# Altium PCB MFC.PcbDoc
Units mm, origin at the board's own origin, x right, y up, seen from the top; angles counter-clockwise.
Board outline 54.12 x 48.52 mm, 2 copper layers (Top Layer, Bottom Layer); 22 components, 29 nets, 104 pads, 46 vias.
Unrouted connection lines stored in the file: 1.
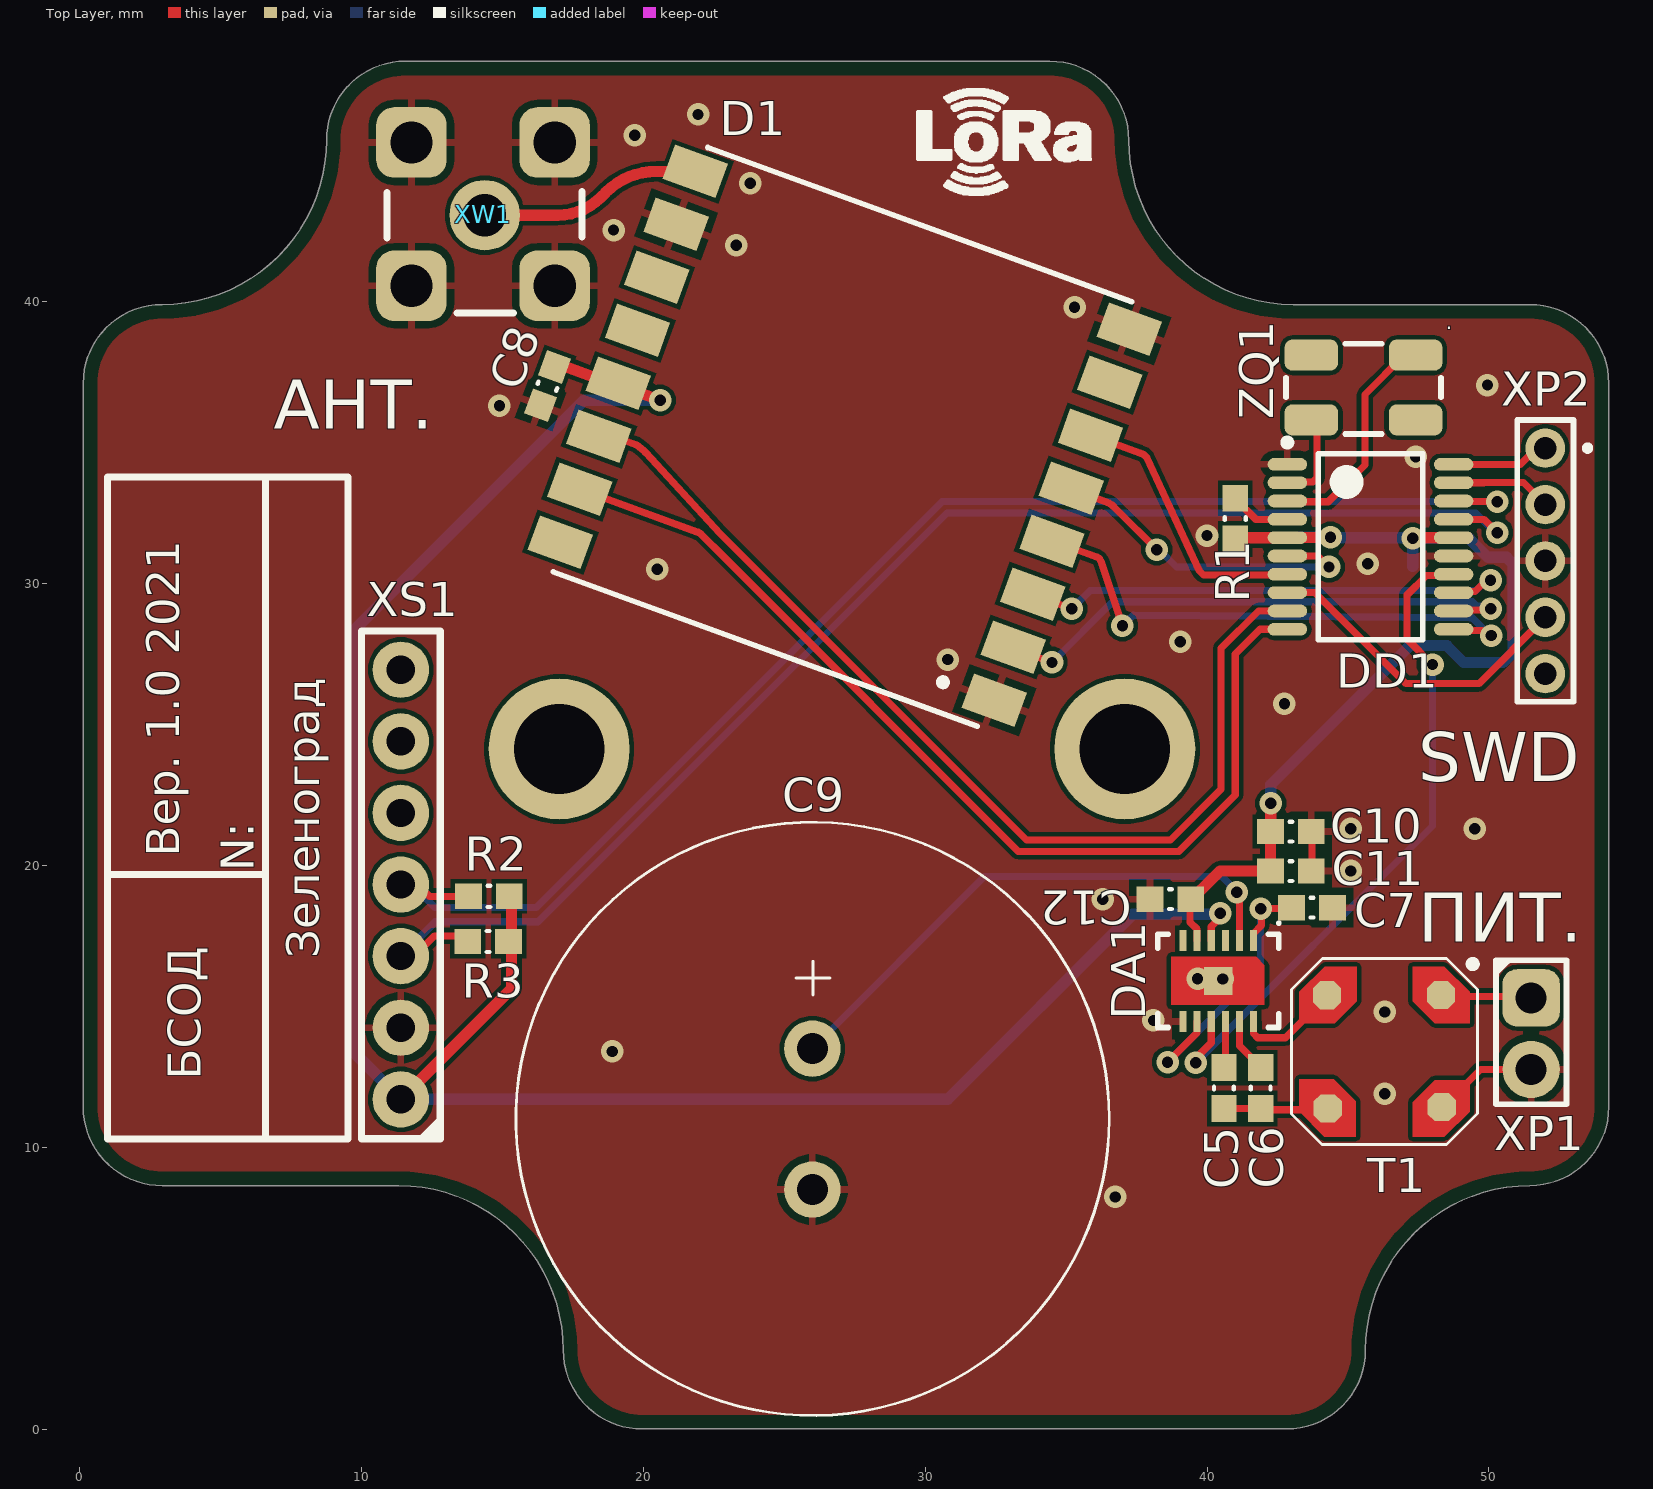
[diagram p0: Top Layer view]
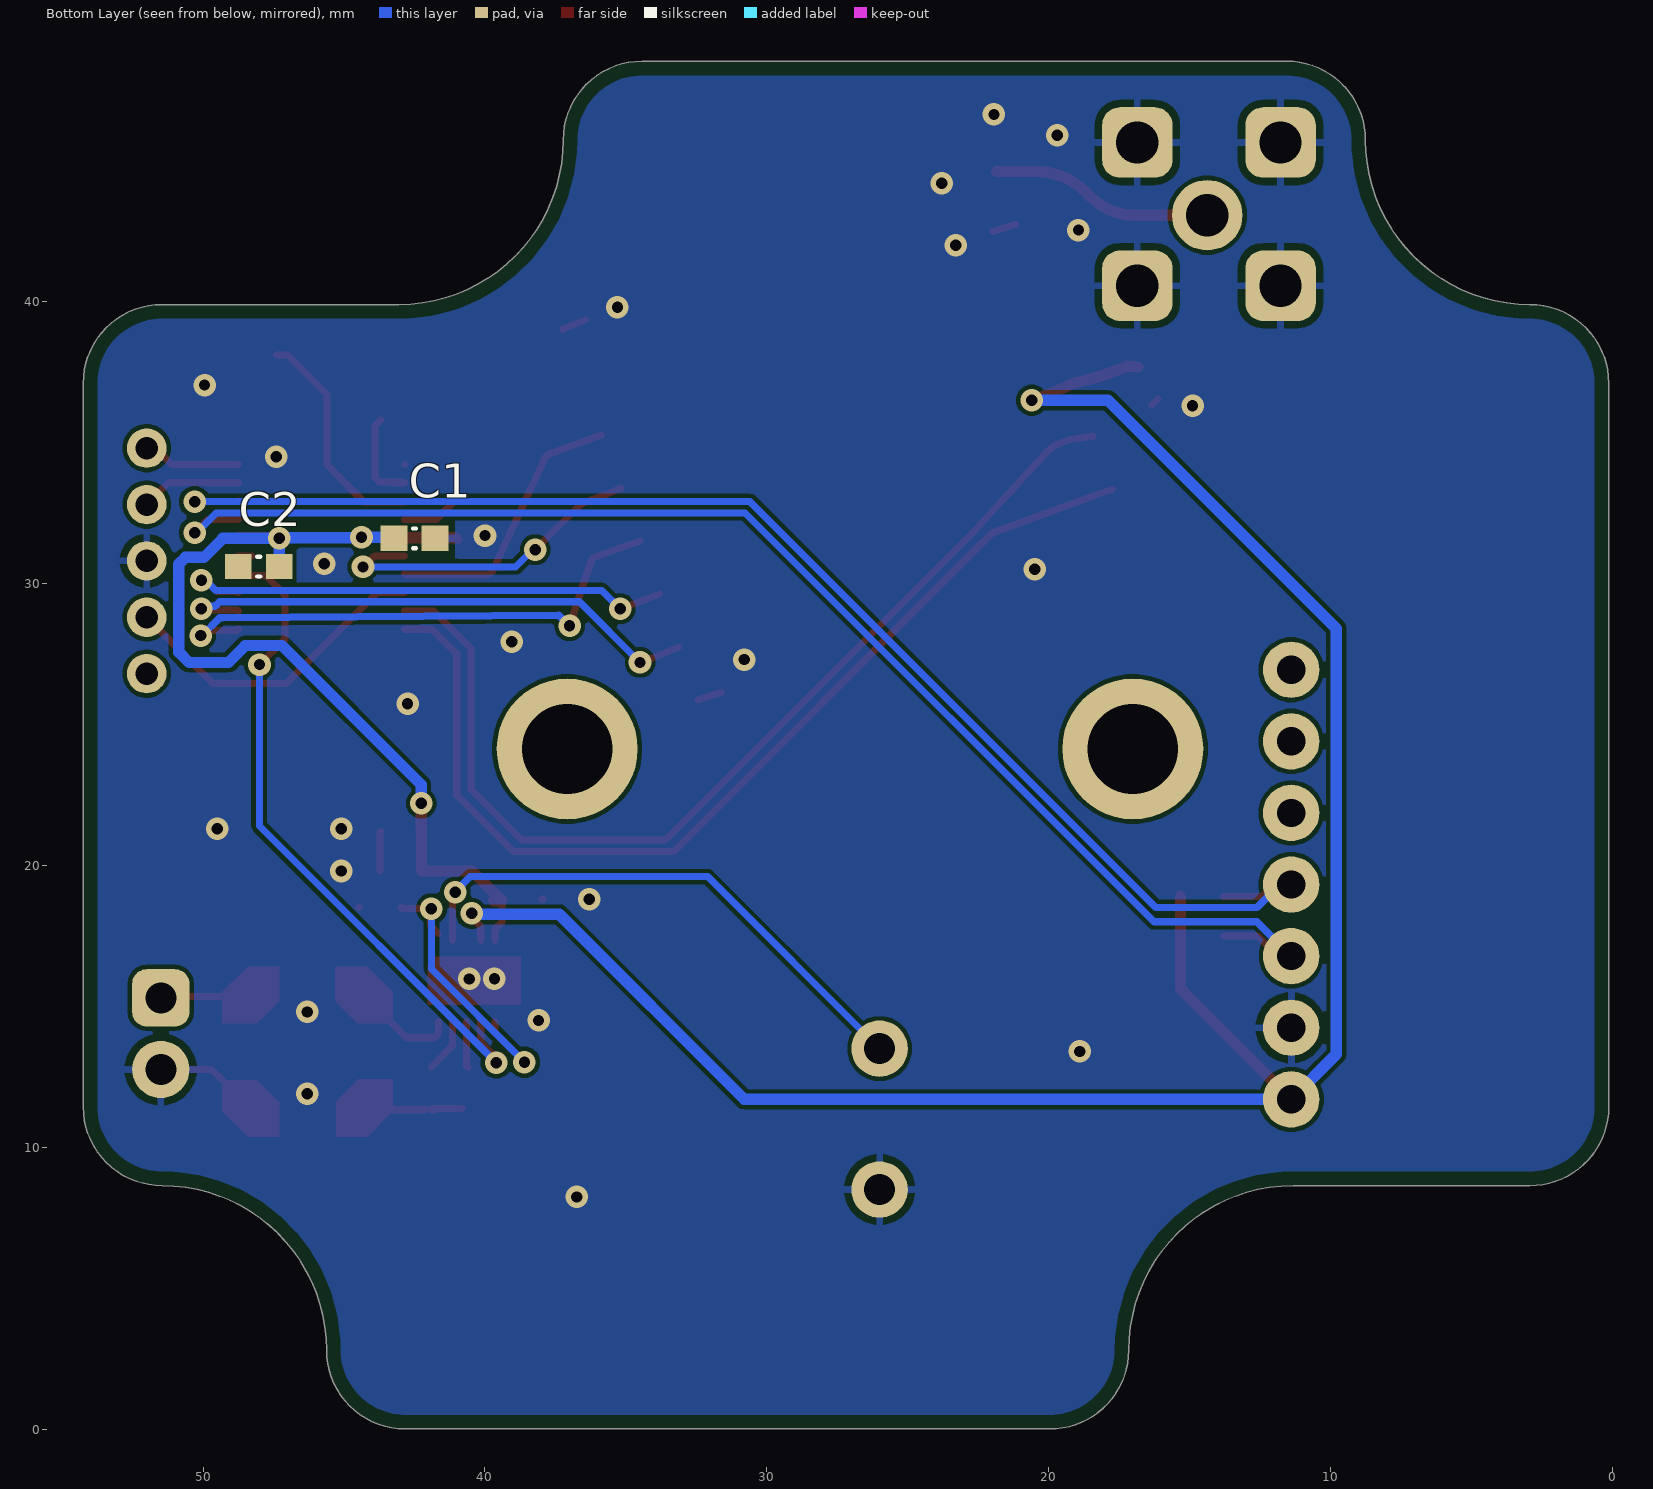
[diagram p1: Bottom Layer view, seen from below]

## Layer stack, top to bottom
Top Solder: solder mask 0.0102, Solder Resist, Dk 3.5
Top Layer: signal copper 0.0356
Dielectric 1: dielectric 0.32, FR-4, Dk 4.8
Bottom Layer: signal copper 0.0356
Bottom Solder: solder mask 0.0102, Solder Resist, Dk 3.5

## Board outline
2.933,8.637 11.33,8.637 cw(c11.33,2.806) 17.162,2.806 ccw(c19.962,2.806) 19.962,0.006 42.822,0.006 ccw(c42.822,2.806) 45.621,2.806 cw(c51.453,2.806) 51.453,8.637 ccw(c51.453,11.437) 54.253,11.437 54.253,37.097 ccw(c51.453,37.097) 51.453,39.896 43.055,39.896 cw(c43.055,45.728) 37.224,45.728 ccw(c34.424,45.728) 34.424,48.527 11.564,48.527 ccw(c11.564,45.728) 8.764,45.728 cw(c2.933,45.728) 2.933,39.896 ccw(c2.933,37.097) 0.133,37.097 0.133,11.437 ccw(c2.933,11.437)

## Design rules (kind name [scope] priority, off if disabled: settings)
BoardOutlineClearance [All] p1: gap=0.5 ignorepadtopadclearanceinfootprint=FALSE
Clearance [All] p1: gap=0.15 ignorepadtopadclearanceinfootprint=FALSE
PlaneConnect [All] p1: pad.planeconnectstyle=Relief pad.reliefexpansion=0.508 pad.reliefentries=4 pad.reliefconductorwidth=0.254 pad.reliefairgap=0.254 via.planeconnectstyle=Direct via.reliefexpansion=0.508 via.reliefentries=4 via.reliefconductorwidth=0.254 via.reliefairgap=0.254
PolygonConnect [All] p1: thpad.connectstyle=Relief thpad.reliefconductorwidth=0.254 thpad.reliefentries=4 thpad.polygonreliefangle="90 Angle" thpad.airgapwidth=0.254 smdpad.connectstyle=Relief smdpad.reliefconductorwidth=0.254 smdpad.reliefentries=4 smdpad.polygonreliefangle="90 Angle" smdpad.airgapwidth=0.254 via.connectstyle=Direct via.reliefconductorwidth=0.254 via.reliefentries=4 via.polygonreliefangle="90 Angle" via.airgapwidth=0.254
RoutingVias [All] p1: holewidth=0.4 width=0.8 viastyle="Through Hole" minholewidth=0.4 minwidth=0.6 maxholewidth=0.711 maxwidth=1.27
SolderMaskExpansion [All] p1: expansion=0.102 istentingtop=FALSE
Width [All] p1: maxlimit=1 minlimit=0.254 preferedwidth=0.254
29 further rules are at their usual default settings.

## Components (designator, comment, footprint, x,y, rotation, side; value= is the part's Value field where it differs from the comment)
C1 "0,1 мк" C_0603 42.5,31.6 r0 bottom value=0.1µF
C2 "0,1 мк" C_0603 48.025,30.6 r180 bottom value=0.1µF
C5 "1000" C_0603 40.6,12.1 r90 top value=1000pF
C6 "220" C_0603 41.9,12.1 r90 top value=220pF
C7 "2,2 мк" C_0603 43.725,18.5 r180 top value=2.2µF
C8 "0,1 мк" C_0603 16.6,37 r70 top value=0.1µF
C9 "1Ф 5,5В" EECF5R5u 26,11 r270 top locked
C10 "2,2 мк" C_0603 42.975,21.2 r180 top value=2.2µF
C11 "0,1 мк" C_0603 42.975,19.8 r180 top value=0.1µF
C12 "10 мк" C_0603 38.7,18.8 r0 top value=10µF
D1 "RFM98W" RFM98W 37.343,40.043 r160 top
DA1 "LTC3108EDE" DFN-12 40.4,15.9 r270 top
DD1 "STM32L010F4P6" TSSOP-20 45.8,31.3 r0 top
R1 "10 к" R_0603 41,32.3 r90 top
R2 "2,2 к" R_0603 14.525,18.9 r0 top
R3 "2,2 к" R_0603 14.5,17.3 r0 top
T1 "1 : 100" LPR6235 46.3,13.3 r270 top
XP1 "PLS-2" PLS-2 51.5,14.03 r0 top
XP2 "PLS2-5" PLS2-5 52,34.8 r270 top
XS1 "PBS-7" PBS-7 11.4,11.7 r90 top
XW1 "L-KLS1-SMA002-B" SMA-JR 14.4,43.1 r90 top
ZQ1 "8 МГц" "MJ CRYSTAL" 47.4,38.1 r180 top

## Footprints (in the part's own frame and the unit in brackets; to place one, negate y for a bottom-side part, rotate by r counter-clockwise, add the part's x,y. Pads: shape width x height; smd on the part's side, far side on the other; paste and mask are expansions set on the pad)
C_0603 [mm] "Chip Resistor, 2-Leads, Body 1.60x0.80mm, IPC Medium Density"
  rect 0.95x0.9 smd: 1(-0.725,0) 2(0.725,0)
  silkscreen extent -0.05,-0.35 0.05,0.35, body extent -0.8,-0.4 0.8,0.4, height 0.8
DFN-12 [mm] "SON, 12-Leads, Body 4.00x3.00mm, Pitch 0.50mm, Thermal Pad 3.30x1.70mm, IPC Medium Density"
  rect 0.75x0.25 smd: 1(-1.44,1.25) 2(-1.44,0.75) 3(-1.44,0.25) 4(-1.44,-0.25) 5(-1.44,-0.75) 6(-1.44,-1.25) 7(1.44,-1.25) 8(1.44,-0.75) 9(1.44,-0.25) 10(1.44,0.25) 11(1.44,0.75) 12(1.44,1.25)
  rect 1x1 smd: 13(0,0)
  Top Layer region: -0.855,-1.662 -0.855,1.338 -0.555,1.638 0.845,1.638 0.845,-1.662
  silkscreen extent -2.1,-2.15 1.65,2.2, body extent -1.5,-2 1.5,2, height 0.75
EECF5R5u [mm]
  round 2 hole 1.1: 1(-2.5,0) 2(2.5,0)
  silkscreen extent -10.53,-10.52 10.52,10.53, body extent -10.75,-10.75 10.76,10.75, height 8.01
LPR6235 [mm]
  oct 1x1 smd: 1(-2.1,2) 2(-2.091,-2.046) 3(1.921,-2.016) 4(1.875,2.025)
  Top Layer region: 2.921,2.121 2.046,3.021 0.921,3.021 0.921,1.771 1.696,0.996 2.921,0.996
  Top Layer region: 2.021,-3.021 2.921,-2.146 2.921,-1.021 1.671,-1.021 0.896,-1.796 0.896,-3.021
  Top Layer region: -3.1,-2.121 -2.225,-3.021 -1.1,-3.021 -1.1,-1.771 -1.875,-0.996 -3.1,-0.996
  Top Layer region: -3.1,2.121 -2.225,3.021 -1.1,3.021 -1.1,1.771 -1.875,0.996 -3.1,0.996
  silkscreen extent -3.4,-3.3 3.2,3.3, body extent -3.17,-3.01 2.91,3.07, height 3.35
"MJ CRYSTAL" [mm]
  rrect50% 1.9x1.1 smd: 1(0,0) 2(3.7,0) 3(3.7,2.3) 4(0,2.3)
  silkscreen extent -0.9,-0.4 4.6,2.8, body extent -0.67,-0.46 4.33,2.74, height 1
PBS-7 [mm]
  round 2 hole 1: 1(0,0) 2(2.54,0) 3(5.08,0) 4(7.62,0) 5(10.16,0) 6(12.7,0) 7(15.24,0)
  silkscreen extent -1.4,-1.4 16.61,1.4, body extent -1.27,-1.27 16.51,1.27, height 8.5
PLS2-5 [mm]
  round 1.4 hole 0.8: 1(0,0) 2(2,0) 3(4,0) 4(6,0) 5(8,0)
  silkscreen extent -1,-1 9,1.6, body extent -1,-1 9,1, height 6.1
PLS-2 [mil] "PLS-2 вилка штыревая 2.54мм 1x2 прямая"
  rrect50% 80x80 hole 43.31: 1(0,50)
  round 80 hole 43.31: 2(0,-50)
  silkscreen extent -49,-98 49,102, body extent -49,-100 49,100, height 335
R_0603 [mm] "Chip Resistor, 2-Leads, Body 1.60x0.80mm, IPC Medium Density"
  rect 0.95x0.9 smd: 1(-0.725,0) 2(0.725,0)
  silkscreen extent -0.05,-0.38 0.05,0.38, body extent -0.8,-0.45 0.75,0.4, height 0.45
RFM98W [mm]
  rect 2x1.3 smd: 1(-0.25,15) 2(-0.25,13) 3(-0.25,11) 4(-0.25,9) 5(-0.25,7) 6(-0.25,5) 7(-0.25,3) 8(-0.25,1) 9(16.125,1) 10(16.125,3) 11(16.125,5) 12(16.125,7) 13(16.125,9) 14(16.125,11) 15(16.125,13) 16(16.125,15)
  silkscreen extent 0,0.05 16,16.08, body extent 0,0 16,16, height 2.04
SMA-JR [mm]
  rrect50% 2.5x2.5 hole 1.5: 1(-2.536,-2.457) 1(-2.536,2.623) 1(2.544,-2.457) 1(2.544,2.623)
  round 2.5 hole 1.5: 2(-0.036,0.023)
  silkscreen extent -3.5,-3.43 0.8,3.49, body extent -3.6,-3.52 11.5,3.48, height 9.86
TSSOP-20 [mm] "TSOP, 20-Leads, Body 6,50x4,40mm, Pitch 0,65mm, IPC Medium Density"
  oval 1.4x0.45 smd: 1(-2.95,2.925) 2(-2.95,2.275) 3(-2.95,1.625) 4(-2.95,0.975) 5(-2.95,0.325) 6(-2.95,-0.325) 7(-2.95,-0.975) 8(-2.95,-1.625) 9(-2.95,-2.275) 10(-2.95,-2.925) 11(2.95,-2.925) 12(2.95,-2.275) 13(2.95,-1.625) 14(2.95,-0.975) 15(2.95,-0.325) 16(2.95,0.325) 17(2.95,0.975) 18(2.95,1.625) 19(2.95,2.275) 20(2.95,2.925)
  silkscreen extent -3.07,-3.3 1.85,3.82, body extent -3.3,-3.3 3.3,3.3, height 1.2

## Part data
C1 C2 C8 C11: library part GRM188R72A104MA35D, "CAP CER 0.1UF 100V X7R 0603", Manufacturer="Murata Electronics", Component Type=Capasitor, ComponentLink1Description=Datasheet, ComponentLink1URL=https://search.murata.co.jp/Ceramy/image/img/A01X/G101/ENG/GRM188R72A104MA35-01.pdf, Part Number=GRM188R72A104MA35D
C5: library part GRM1885C1H102FA01J, "CAP CER 1000PF 50V C0G/NP0 0603", Manufacturer="Murata Electronics", Component Type=Capasitor, ComponentLink1Description=Datasheet, ComponentLink1URL=https://www.murata.com/~/media/webrenewal/support/library/catalog/products/capacitor/mlcc/c02e.ashx?la=en-us, Part Number=GRM1885C1H102FA01J
C6: library part GRM1885C2A221FA01D, "CAP CER 220PF 100V C0G/NP0 0603", Manufacturer="Murata Electronics", Component Type=Capasitor, ComponentLink1Description=Datasheet, ComponentLink1URL=https://www.murata.com/~/media/webrenewal/support/library/catalog/products/capacitor/mlcc/c02e.ashx?la=en-us, Part Number=GRM1885C2A221FA01D
C7 C10: library part GRM188R61E225MA12D, "CAP CER 2.2UF 25V X5R 0603", Manufacturer="Murata Electronics", Component Type=Capasitor, ComponentLink1Description=Datasheet, ComponentLink1URL=https://search.murata.co.jp/Ceramy/image/img/A01X/G101/ENG/GRM188R61E225MA12-01.pdf, Part Number=GRM188R61E225MA12D
C9: library part EECF5R5U105, "1 Ф, 5.5 В, 5 мм, 2208H, Ионистор"
C12: library part GRM185R60J106ME15J, "CAP CER 10UF 6.3V X5R 0603", Manufacturer="Murata Electronics", Component Type=Capasitor, ComponentLink1Description=Datasheet, ComponentLink1URL=https://search.murata.co.jp/Ceramy/image/img/A01X/G101/ENG/GRM185R60J106ME15-01.pdf, Part Number=GRM185R60J106ME15J
D1: "LoRa modem"
DA1: "Ultralow Voltage Step-Up Converter and Power Manager"
R1: library part CR0603-FX-1002ELF, "RES SMD 10K OHM 1% 1/10W 0603", Manufacturer="Bourns Inc.", Component Type=Resistor, ComponentLink1Description=Datasheet, ComponentLink1URL=https://www.bourns.com/pdfs/chpreztr.pdf, Part Number=CR0603-FX-1002ELF
R2 R3: library part CR0603-FX-2201ELF, "RES SMD 2.2K OHM 1% 1/10W 0603", Manufacturer="Bourns Inc.", Component Type=Resistor, ComponentLink1Description=Datasheet, ComponentLink1URL=https://www.bourns.com/pdfs/chpreztr.pdf, Part Number=CR0603-FX-2201ELF
T1: library part LPR6235-752SMR, "Coupled Inductor"
ZQ1: library part NX5032GA-8MHz

## Free pads (board coordinates)
  round 5 hole 3.2: 0(17.018,24.13) 0(37.084,24.13)

## Via types
v1: diameter 0.8, hole 0.4, Top Layer to Bottom Layer, tented both sides, 46 vias

## Nets (pads, with @x,y where several pads share a name; then routed paths per layer and width w, separated by ;. In a path a pad name is that pad's centre, name@x,y a point inside that pad or via, vN(x,y) a via of type N, cw(c..) or ccw(c..) an arc to the next point about the centre after c; other vN are vias at no path point)
3V3: C1.2 C2.2 C10.2 C11.2 C12.2 DA1.5 DD1.5 DD1.16 R1.1 | length 36.3
  Top Layer w0.254: C12.2@39.4,18.741 39.4,17.982 39.65,17.732 DA1.5
  Top Layer w0.4: C12.2@39.7,18.741 39.4,18.741 39.4,18.75 39.773,19.123 39.782,19.123 40.459,19.8 C11.2 C10.2 42.257,21.207 v1(42.257,22.202) ; R1.1 41.05,31.625 DD1.5 42.859,31.634 44.37,31.634 v1(44.379,31.643) ; v1(47.3,31.6) 47.325,31.625 DD1.16
  Bottom Layer w0.4: v1(42.257,22.202) 42.257,22.857 47.2,27.8 48.5,27.8 49.1,27.2 50.5,27.2 50.862,27.562 50.862,30.693 50.628,30.927 49.973,30.927 49.3,31.6 v1(47.3,31.6) ; C1.2 43.268,31.643 v1(44.379,31.643) 44.401,31.621 47.279,31.621 v1(47.3,31.6) ; C2.2 v1(47.3,31.6)
GND: C1.1 C2.1 C7.1 C8.1 C9.2 C10.1 C11.1 C12.1 D1.1 D1.8 D1.10 DA1.7 DA1.13 DD1.1 DD1.15 T1.4 XP1.2 XP2.3 XS1.2 XW1.1 | length 8.8
  Top Layer w0.254: C8.1@16.129,36.541 C8.1 ; D1.10 D1.10@22,42.482 ; D1.1@31.616,26.13 D1.1 ; D1.8@36.429,39.353 D1.8 ; C12.1@37.95,18.8 C12.1 ; DA1.13 40.47,15.97 v1(40.556,15.97) ; DD1.1@42.846,34.221 DD1.1 ; C10.1 43.725,21.175 C11.1@43.725,19.8 ; C7.1 C7.1@44.465,18.515 ; DD1.15@48.275,30.975 DD1.15 ; T1.4 48.367,11.425 49.702,12.76 XP1.2
  other v1: 36.747,8.237 46.3,11.9 18.9,13.4 38.1,14.5 46.3,14.8 39.665,15.976 36.3,18.8 45.1,19.8 45.1,21.3 49.5,21.3 42.747,25.737 30.8,27.3 39.047,27.937 20.5,30.5 45.7,30.7 40,31.7 47.4,34.5 14.9,36.3 49.947,37.037 35.3,39.8 23.3,42 18.947,42.537 23.8,44.2 19.7,45.9 21.947,46.637
I2C_SCL: DD1.17 R3.1 XS1.3 | length 50.1
  Top Layer w0.254: XS1.3 11.872,16.78 12.592,17.5 R3.1@13.8,17.5 ; DD1.17 49.825,32.275 v1(50.3,31.8)
  Bottom Layer w0.254: XS1.3 12.62,18 16.271,18 30.771,32.5 49.536,32.5 50.236,31.8 v1(50.3,31.8)
I2C_SDA: DD1.18 R2.1 XS1.4 | length 49.3
  Top Layer w0.254: XS1.4 11.734,18.986 12.336,18.986 12.422,18.9 R2.1 ; DD1.18 48.763,32.912 50.288,32.912 v1(50.3,32.9)
  Bottom Layer w0.254: XS1.4 11.802,19.32 12.622,18.5 16.2,18.5 30.604,32.904 50.296,32.904 v1(50.3,32.9)
LOAD_SW: DA1.9 DD1.14 | length 24.1
  Top Layer w0.254: v1(39.6,13) 39.6,13.154 40.15,13.704 DA1.9 ; v1(47.998,27.123) 47.1,28.021 47.1,29.6 47.787,30.287 48.712,30.287 DD1.14
  Bottom Layer w0.254: v1(39.6,13) 48,21.4 48,27.121 v1(47.998,27.123)
LORA_DIO0: D1.14 DD1.9 | length 36.6
  Top Layer w0.254: D1.14 19.256,35.102 19.773,34.914 20.015,34.716 20.093,34.638 22.724,31.776 33.6,20.9 38.7,20.9 40.5,22.7 40.5,27.7 41.825,29.025 DD1.9
LORA_DIO1: D1.15 DD1.10 | length 36.2
  Top Layer w0.254: D1.15 18.566,33.047 21.911,31.829 cw(c21.86,31.58) 22.039,31.761 ; 22.04,31.76 22.89,30.91 33.304,20.496 38.996,20.496 41,22.5 41,27.5 41.875,28.375 DD1.10
LORA_MISO: D1.2 DD1.12 | length 19.4
  Top Layer w0.254: D1.2 33.938,27.404 v1(34.5,27.2) ; DD1.12 48.788,29.063 50.023,29.063 v1(50.062,29.101)
  Bottom Layer w0.254: v1(34.5,27.2) 36.65,29.35 49.416,29.35 49.572,29.194 49.97,29.194 v1(50.062,29.101)
LORA_MOSI: D1.3 DD1.13 | length 18.2
  Top Layer w0.254: D1.3 34.631,29.307 v1(35.2,29.1) ; DD1.13 48.788,29.713 49.51,29.713 49.911,30.113 v1(50.058,30.113)
  Bottom Layer w0.254: v1(35.2,29.1) 35.854,29.754 49.552,29.754 49.911,30.113 v1(50.058,30.113)
LORA_NSS: D1.5 DD1.6 | length 11.8
  Top Layer w0.254: D1.5 35.993,33.05 36.522,32.858 36.641,32.773 36.79,32.624 v1(38.213,31.2) ; DD1.6 43.925,30.975 44.313,30.587 v1(44.327,30.587)
  Bottom Layer w0.254: v1(38.213,31.2) 38.301,31.2 38.914,30.587 v1(44.327,30.587)
LORA_RST: D1.6 DD1.7 | length 9.8
  Top Layer w0.254: D1.6 35.878,35.263 37.616,34.631 37.754,34.576 37.86,34.47 39.732,30.447 39.838,30.341 39.879,30.3 39.962,30.3 42.825,30.3 DD1.7
LORA_SCK: D1.4 DD1.11 | length 19.2
  Top Layer w0.254: D1.4 35.326,31.218 36.085,30.942 ; 36.085,30.942 cw(c35.998,30.703) 36.239,30.784 v1(37,28.5) ; DD1.11 48.788,28.337 49.753,28.337 49.939,28.152 v1(50.087,28.152)
  Bottom Layer w0.254: v1(37,28.5) 37.381,28.875 49.305,28.786 49.409,28.785 50.043,28.152 v1(50.087,28.152)
NetC5_1: C5.1 C6.1 T1.3 | length 3.2
  Top Layer w0.254: C5.1@40.8,11.375 41.721,11.375 C6.1 ; C6.1@41.7,11.35 41.721,11.329 C6.1@41.9,11.329 ; C6.1@42.1,11.329 T1.3@43.954,11.329
NetC5_2: C5.2 DA1.10 | length 1.7
  Top Layer w0.254: C5.2 40.65,12.875 DA1.10
NetC6_2: C6.2 DA1.11 | length 1.9
  Top Layer w0.254: DA1.11 41.15,13.6 41.9,12.85 C6.2
NetC7_2: C7.2 DA1.1 DA1.8 | length 10.8
  Top Layer w0.254: v1(38.6,13.018) 39.65,14.068 DA1.8 ; DA1.1@41.652,17.588 41.927,17.863 41.927,18.44 v1(41.902,18.465) 42.94,18.465 C7.2@42.975,18.5
  Bottom Layer w0.254: v1(38.6,13.018) 41.902,16.32 v1(41.902,18.465)
NetC9_1: C9.1 DA1.2 | length 19.6
  Top Layer w0.254: v1(41.056,19.05) 41.15,18.956 DA1.2
  Bottom Layer w0.254: C9.1 32.1,19.6 40.523,19.6 41.056,19.067 v1(41.056,19.05)
NetD1_9: D1.9 XW1.2 | length 7.9
  Top Layer w0.4: XW1.2 16.965,43.064 ccw(c16.965,45.235) 18.5,43.7 18.674,43.874 cw(c20.47,42.078) 20.47,44.618 D1.9
NetDA1_12: DA1.12 T1.2 | length 3.8
  Top Layer w0.254: DA1.12 41.652,14.458 41.652,14.031 41.801,13.882 42.782,13.882 43.7,14.8 43.8,14.8 44.254,15.254 T1.2
NetDD1_2: DD1.2 ZQ1.3 | length 3.7
  Top Layer w0.254: DD1.2@43.315,33.575 DD1.2 42.85,33.6 43.751,33.6 43.9,33.749 43.9,35.6 ZQ1.3
NetDD1_3: DD1.3 ZQ1.1 | length 8.2
  Top Layer w0.254: DD1.3 42.875,32.9 44.3,32.9 45.6,34.2 45.6,36.7 47,38.1 ZQ1.1
NetDD1_4: DD1.4 R1.2 | length 2.2
  Top Layer w0.254: R1.2 41,33 41.725,32.275 DD1.4
NetT1_1: T1.1 XP1.1 | length 3.6
  Top Layer w0.254: T1.1@47.97,15.35 51.45,15.35 XP1.1
SENS_RDY: XS1.5
SWCLK: DD1.20 XP2.1 | length 3.5
  Top Layer w0.254: DD1.20 51.115,34.225 51.69,34.8 XP2.1
SWDIO: DD1.19 XP2.2 | length 3.6
  Top Layer w0.254: DD1.19 49.818,33.575 49.82,33.577 51.223,33.577 XP2.2
UART_RX: XP2.5
UART_TX: DD1.8 XP2.4 | length 11.5
  Top Layer w0.254: DD1.8 43.825,29.675 47.054,26.446 49.646,26.446 XP2.4
VDD_: C8.2 D1.13 DA1.4 R2.2 R3.2 XS1.1 | length 77.2
  Top Layer w0.254: DA1.4@40.152,17.342 40.152,17.831 v1@40.473,18.152
  Top Layer w0.4: XS1.1 15.325,15.625 R2.2@15.325,18.9 ; C8.2 17.2,37.705 18.263,37.318 D1.13 19.914,36.75 v1(20.6,36.5) ; v1@40.473,18.152 v1(40.473,18.3)
  Bottom Layer w0.4: v1(20.6,36.5) 17.9,36.5 9.8,28.4 9.8,13.3 XS1.1 30.8,11.7 37.365,18.265 40.438,18.265 v1(40.473,18.3)
pads on no net: D1.7 D1.11 D1.12 D1.16 DA1.3 DA1.6 XS1.6 XS1.7 ZQ1.2 ZQ1.4

## Polygon pours and split planes (outlines as drawn)
GND on Bottom Layer "NONET_L-01_P-001" (solid, remove dead copper, pour order 0): -0.254,-0.889 -0.254,50.8 55.372,50.8 55.372,-1.016
GND on Top Layer "NONET_L-01_P-001" (solid, remove dead copper, pour order 2): -1.161,-0.734 -1.161,50.955 54.465,50.955 54.465,-0.861

## Silkscreen, mask and mechanical layers (free items; w line width, h text height)
Top Overlay:
  drawing of 485 lines, arcs and shapes, not listed
  text "АНТ." at 6.9,34.9 h3
  text "SWD" at 47.5,22.4 h3
  text "Вер. 1.0 2021" at 3.937,20.307 h2 r90
  text "N:" at 6.578,19.789 h2 r90
  text "Зеленоград" at 8.9,16.7 h2 r90
  text "ПИТ." at 47.5,16.7 h3
  text "БСОД" at 4.7,12.4 h2 r90
Mechanical 2:
  lines w0.013: 0.133,11.437 ccw(c2.933,11.437) 2.933,8.637 11.33,8.637 cw(c11.33,2.806) 17.162,2.806 ccw(c19.962,2.806) 19.962,0.006 42.822,0.006 ccw(c42.822,2.806) 45.621,2.806 cw(c51.453,2.806) 51.453,8.637 ccw(c51.453,11.437) 54.253,11.437 54.253,37.097 ccw(c51.453,37.097) 51.453,39.896 43.055,39.896 cw(c43.055,45.728) 37.224,45.728 ccw(c34.424,45.728) 34.424,48.527 11.564,48.527 ccw(c11.564,45.728) 8.764,45.728 cw(c2.933,45.728) 2.933,39.896 ccw(c2.933,37.097) 0.133,37.097 0.133,11.437